# Altium PCB PCB_配电变压器智能监测系统_2022-01-25.pcbdoc (part 2 of 2)
Units mil, origin at the board's own origin, x right, y up, seen from the top; angles counter-clockwise.
Board outline 10255 x 6268.94 mil, 2 copper layers (Top Layer, Bottom Layer); 221 components, 191 nets, 862 pads, 208 vias.
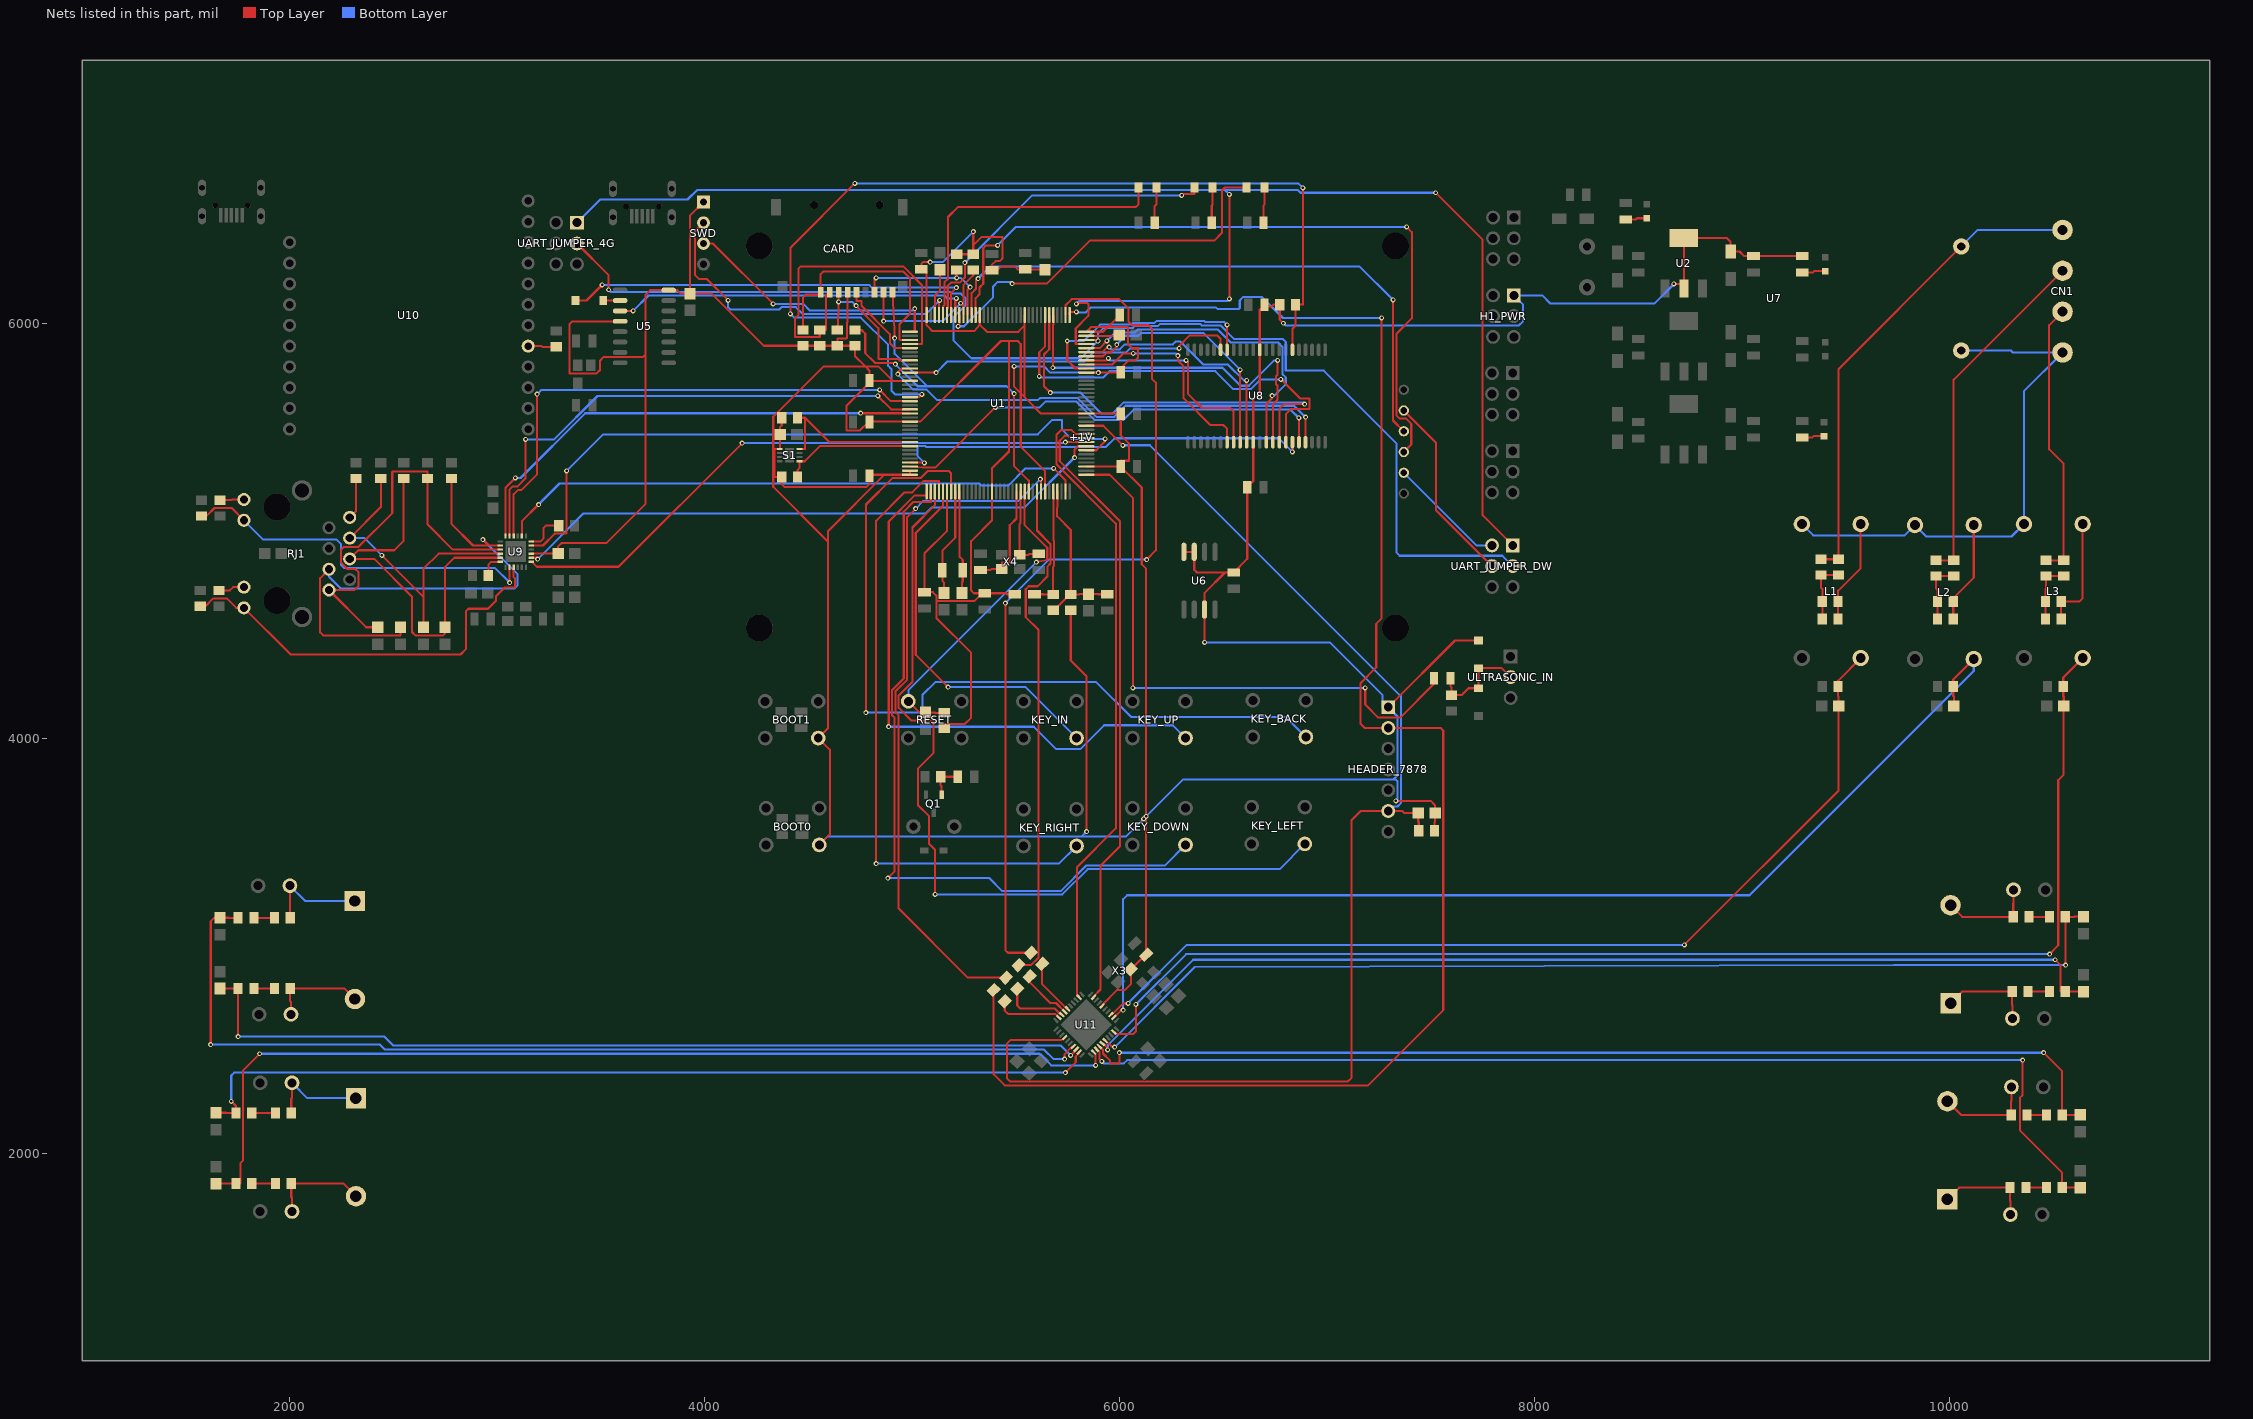
[diagram p2: the nets of this part, all layers, seen from the top]

## Via types
v1: diameter 24, hole 12, Top Layer to Bottom Layer, 208 vias

## Nets (pads, with @x,y where several pads share a name; then routed paths per layer and width w, separated by ;. In a path a pad name is that pad's centre, name@x,y a point inside that pad or via, vN(x,y) a via of type N, cw(c..) or ccw(c..) an arc to the next point about the centre after c; other vN are vias at no path point) (continued)
FSMC_D7: U1.63 U8.16 | length 1139.9
  Top Layer w10: v1(5748,5915) 5748,5821.82 5787.5,5782.32 U1.63@5840.2,5782.32 ; U8.16@6518.27,5872.66 v1(6518.27,5992.23)
  Bottom Layer w10: v1(5748,5915) 5828,5915 5907,5994 6056.5,5994 6065,6002.5 6169,6002.5 6178.5,6012 6408,6012 6414.41,6005.59 6504.91,6005.59 v1(6518.27,5992.23)
FSMC_D8: U1.64 U8.29 | length 1019.9
  Top Layer w10: U1.64@5840.2,5802.01 5965.53,5802.01 6019.02,5855.5 v1(6066.06,5855.5) ; v1(6281.5,5844.5) 6281.5,5819.91 6308.88,5792.54 6308.88,5638.62 6437.49,5510 6500,5510 6518.27,5491.73 U8.29@6518.27,5427.34
  Bottom Layer w10: v1(6066.06,5855.5) 6270.5,5855.5 v1(6281.5,5844.5)
FSMC_D9: U1.65 U8.30 | length 1056.8
  Top Layer w10: U1.65@5840.2,5821.69 5936.18,5821.69 v1(5945.68,5831.19) ; v1(6321,5821.5) 6330.64,5811.86 6330.64,5658.96 6397.6,5592 6532.76,5592 6549.76,5575 U8.30@6549.76,5427.34
  Bottom Layer w10: v1(5945.68,5831.19) 5955.37,5821.5 v1(6321,5821.5)
FSMC_D10: U1.66 U8.31 | length 1216.7
  Top Layer w10: U1.66@5840.2,5841.38 5920.34,5841.38 5939.87,5860.9 5960.31,5860.9 5986.5,5887.1 v1(5986.5,5898) ; U8.31@6581.26,5427.34 v1(6581.26,5775.74)
  Bottom Layer w10: v1(5986.5,5898) 6029,5940.5 6090.5,5940.5 6104.5,5954.5 6402.5,5954.5 v1(6581.26,5775.74)
FSMC_D11: U1.67 U8.32 | length 1177.8
  Top Layer w10: U1.67@5840.2,5861.06 5917.4,5861.06 5941.34,5885 v1(5950,5885) ; U8.32@6612.76,5427.34 6612.76,5724.76 v1(6613,5725)
  Bottom Layer w10: v1(5950,5885) 5960,5875 6001.07,5875 6025.07,5899 6256.5,5899 6270,5912.5 6292.5,5912.5 6403,5802 6522,5802 6599,5725 v1(6613,5725)
FSMC_D12: U1.68 U8.35 | length 1528.3
  Top Layer w10: U1.68@5840.2,5880.75 5904.25,5880.75 v1(5939.5,5916) ; U8.35@6707.24,5427.34 6707.24,5611.24 6735,5639 v1(6735,5651.5)
  Bottom Layer w10: v1(5939.5,5916) 5980,5956.5 6074.5,5956.5 6088.5,5970.5 6472.88,5970.5 6535.38,5908 6764.5,5908 6785,5887.5 6785,5756 6801,5740 6801,5706.74 6745.76,5651.5 v1(6735,5651.5)
FSMC_D13: U1.77 U8.36 | length 1835
  Top Layer w10: v1(5678.41,5786.09) 5678.41,5992.66 5680.75,5995 U1.77@5680.75,6040.2 ; U8.36@6738.74,5427.34 6738.74,5610.24 6761,5632.5 6761,5700.4 6754.66,5706.74 6754.66,5746.4 6762,5753.74 v1(6762,5822)
  Bottom Layer w10: v1(5678.41,5786.09) 5678.5,5786 6496,5786 6582.73,5699.27 6623.27,5699.27 6746,5822 v1(6762,5822)
FSMC_D14: U1.78 U8.37 | length 1982.6
  Top Layer w10: U1.78@5661.07,6040.2 5661.07,5875.08 5636,5850.02 5636,5697.59 v1(5667,5666.59) ; U8.37@6770.24,5427.34 6770.24,5588.74 6792.5,5611 v1(6892.5,5611)
  Bottom Layer w10: v1(5667,5666.59) 5811.41,5666.59 5912.5,5565.5 5967.5,5565.5 6021,5619 6884.5,5619 v1(6892.5,5611)
FSMC_D15: U1.79 U8.38 | length 2026
  Top Layer w10: v1(5613,5745) 5613,5860.62 5641.38,5889 U1.79@5641.38,6040.2 ; v1(6778,5730) 6870,5638 6913,5638 6915.5,5635.5 6915.5,5589 6914.5,5588 6827,5588 6801.73,5562.73 U8.38@6801.73,5427.34
  Bottom Layer w10: v1(5613,5745) 5619,5739 5921,5739 5952,5770 6461.56,5770 6548.56,5683 6633,5683 6680,5730 v1(6778,5730)
FSMC_NBL0: U1.141 U8.39 | length 2061.7
  Top Layer w10: U1.141@4989.81,5329.57 5057.87,5329.57 v1(5059.43,5328) ; v1(6833,5381) 6833.23,5381.23 U8.39@6833.23,5427.34
  Bottom Layer w10: v1(5059.43,5328) 5027,5360.43 5027,5407 5028,5408 5065,5408 5069,5404 5933.75,5404 5976,5446.25 6767.75,5446.25 v1(6833,5381)
FSMC_NBL1: U1.142 U8.40 | length 2199.5
  Top Layer w10: U1.142@4989.81,5309.88 5049.57,5304.76 5111.45,5304.76 v1(5401.69,5595) ; U8.40@6864.72,5427.34 v1(6864.72,5543.99)
  Bottom Layer w10: v1(5401.69,5595) 5614.78,5595 5643.81,5624.03 5789.97,5624.03 5880.5,5533.5 6016.84,5533.5 6067.93,5584.59 6824.12,5584.59 v1(6864.72,5543.99)
FSMC_NE3: R6.1 U1.125 U8.6 | length 4724.9
  Top Layer w10: v1(4414,6046) 4414,6365 v1(4724,6675) ; U1.125@4989.81,5644.53 5033.53,5644.53 v1(5047,5658) ; U8.6@6833.23,5872.66 6833.23,5973 6848.04,5987.81 R6.1@6848.04,6090 6883,6090 6884,6091 v1(6884,6653)
  Bottom Layer w10: v1(4414,6046) 4432,6028 4753,6028 4884.5,5896.5 4884.5,5795.5 4901,5779 4901,5675 4918,5658 v1(5047,5658) ; v1(4724,6675) 6862,6675 v1(6884,6653)
FSMC_NOE: U1.118 U8.41 | length 2297.7
  Top Layer w10: v1(4932,5755) 4932,5764.32 4950,5782.32 U1.118@4989.81,5782.32 ; U8.41@6896.22,5427.34 v1(6896.22,5547.78)
  Bottom Layer w10: v1(4932,5755) 5006,5681 5070,5681 5121,5630 5606.43,5630 5616.47,5640.03 5797.97,5640.03 5888.5,5549.5 5974.33,5549.5 6027.83,5603 6841,5603 v1(6896.22,5547.78)
FSMC_NWE: U1.119 U8.17 | length 1637.3
  Top Layer w10: U1.119@4989.81,5762.64 v1(5116,5762.64) ; v1(6287,5879.66) 6287,5891 6338,5942 6469.77,5942 6486.77,5925 U8.17@6486.77,5872.66
  Bottom Layer w10: v1(5116,5762.64) 5169.36,5816 5829,5816 5872,5859 6030.58,5859 6051.24,5879.66 v1(6287,5879.66)
IAN: C62.1 R60.2 U11.8 | length 4410.7
  Top Layer w10: C62.1@1665,2794.45 1708,2794.45 1708.55,2795 R60.2@1751.96,2795 v1(1751.96,2563) ; v1(5764.75,2471.75) 5791.28,2498.28 U11.8@5791.28,2501.69
  Bottom Layer w10: v1(1751.96,2563) 2456,2563 2499,2520 5716.5,2520 v1(5764.75,2471.75)
IAP: C61.2 R59.2 U11.7 | length 4959.3
  Top Layer w10: v1(1620,2524) 1620,3118.05 1637.5,3135.55 C61.2@1665,3135.55 1708,3135.55 1708.55,3135 R59.2@1751.96,3135 ; v1(5735,2454) 5735,2477.73 5772.87,2515.6 U11.7@5777.37,2515.6
  Bottom Layer w10: v1(1620,2524) 2436,2524 2460,2500 5636,2500 5682,2454 v1(5735,2454)
IBN: C63.1 R63.2 U11.12 | length 4902.5
  Top Layer w10: C63.1@1645,1854.45 1693,1854.45 1693.55,1855 R63.2@1741.96,1855 1764,1855 1764,1954 1776,1966 1776,2400 v1(1856,2480) ; U11.12@5874.8,2487.76 5885,2477.56 v1(5885,2424)
  Bottom Layer w10: v1(1856,2480) 5615,2480 5671,2424 v1(5885,2424)
IBP: C64.2 R64.2 U11.9 | length 4438.5
  Top Layer w10: C64.2@1645,2195.55 1693,2195.55 1693.55,2195 R64.2@1741.96,2195 1741.96,2228.04 v1(1719,2251) ; v1(5738.77,2389) 5789,2439.23 5789,2467.08 5805.21,2483.28 U11.9@5805.21,2487.76
  Bottom Layer w10: v1(1719,2251) 1719,2375 1733,2389 v1(5738.77,2389)
ICN: C65.1 R67.2 U11.14 | length 5077.7
  Top Layer w10: U11.14@5902.64,2515.6 5920.01,2498.23 5920.01,2481.33 5953,2448.34 5953,2434.76 5954,2433.76 5998.1,2433.76 5999.34,2435 v1(5999.34,2485) ; v1(10454,2485) 10543.04,2395.96 R67.2@10543.04,2185 10586,2185 10586.55,2185.55 C65.1@10630,2185.55
  Bottom Layer w10: v1(5999.34,2485) v1(10454,2485)
ICP: C66.2 R68.2 U11.13 | length 5308.1
  Top Layer w10: U11.13@5888.72,2501.69 5904.01,2486.4 5904.01,2453.58 v1(5914.59,2443) ; v1(10352,2449) 10352,2281 10339,2268 10339,2111 10543,1907 R68.2@10543.04,1835 ; R68.2@10543.04,1835 10586,1835 10586.55,1834.45 C66.2@10630,1834.45
  Bottom Layer w10: v1(5914.59,2443) 5923.83,2433.76 6021,2433.76 6036.24,2449 v1(10352,2449)
INN: C67.1 R71.2 U11.16 | length 5122.2
  Top Layer w10: U11.16@5930.47,2543.44 5934.41,2543.44 5966.01,2511.85 v1(5976,2511.85) ; v1(10559,2907) 10558.04,2907.96 R71.2@10558.04,3140 10601,3140 10601.55,3140.55 C67.1@10645,3140.55
  Bottom Layer w10: v1(5976,2511.85) 6362.15,2898 9732,2907 v1(10559,2907)
INP: C68.2 R72.2 U11.15 | length 5076.6
  Top Layer w10: U11.15@5916.56,2529.53 5920.48,2529.53 5943.01,2507 v1(5943.01,2498.74) ; v1(10509,2933) 10534,2908 10535,2780 R72.2@10558.04,2780 10601,2780 10601.55,2779.45 C68.2@10645,2779.45
  Bottom Layer w10: v1(5943.01,2498.74) 5943.01,2521.09 6354.92,2933 v1(10509,2933)
IRQ0_7878: U1.46 U11.29 | length 2994.6
  Top Layer w10: U1.46@5840.2,5447.68 5781.32,5447.68 5735.82,5458.5 5712,5434.68 5712,5336.17 6002,5046.17 6002,3480 5908,3386 5908,2789.92 5874.8,2756.72 U11.29@5874.8,2752.24
IRQ1_7878: U1.47 U11.32 | length 3077.4
  Top Layer w10: U11.32@5805.2,2752.24 5805.2,2756 5798,2756 5795,2759 5795,3379 5982,3566 5982,5035 5696,5321 5696,5463 5720,5487 5766.86,5487 5786.5,5467.36 U1.47@5840.2,5467.36
KEY_BACK: KEY_BACK.3 U1.7 | length 3905.2
  Top Layer w10: v1(4778,4124) 4778,5127 4905,5254 5041,5254 5075.76,5288.76 5176.24,5288.76 5188.62,5276.38 U1.7@5188.62,5189.8
  Bottom Layer w10: v1(4778,4124) 5037.5,4124 5050.5,4137 5050.5,4209.5 5112,4271 5887.5,4271 6055.5,4103 6801.37,4103 KEY_BACK.3@6897.95,4006.42
KEY_DOWN: KEY_DOWN.3 U1.2 | length 3561.4
  Top Layer w10: v1(4883,3326) 4916,3359 4916,4099 4903.61,4111.39 4903.61,4232.26 4960,4288.65 4960,5093 5006,5139 5089.2,5139 5090.2,5140 U1.2@5090.2,5189.8
  Bottom Layer w10: v1(4883,3326) 5373,3326 5435,3264 5717,3264 5841,3388 6219.54,3388 KEY_DOWN.3@6317.95,3486.42
KEY_IN: KEY_IN.3 U1.5 | length 1782.5
  Top Layer w10: U1.5@5149.25,5189.8 5149.25,5121 5018,4989.75 5018,4403 v1(5174,4247)
  Bottom Layer w10: v1(5174,4247) 5547.37,4247 KEY_IN.3@5792.95,4001.42
KEY_LEFT: KEY_LEFT.3 U1.3 | length 4093.1
  Top Layer w10: U1.3@5109.88,5189.8 5109.88,5124 5002,5016.12 5002,4273 4935.61,4206.61 4935.61,4147.39 4997,4086 5102,4086 5103,4085 5103,3929 5028,3854 5028,3679 5082,3625 5082,3491 5111,3462 v1(5111,3248)
  Bottom Layer w10: v1(5111,3248) 5724,3248 5846,3370 6771.54,3370 KEY_LEFT.3@6892.95,3491.42
KEY_RIGHT: KEY_RIGHT.3 U1.4 | length 3087.1
  Top Layer w10: v1(4827,3396) 4827,5049.05 4963.77,5185.82 5001,5185.82 5056.18,5241 5128.57,5241 5129.57,5240 U1.4@5129.57,5189.8
  Bottom Layer w10: v1(4827,3396) 5707.54,3396 KEY_RIGHT.3@5792.95,3481.42
KEY_UP: KEY_UP.3 U1.1 | length 2790.9
  Top Layer w10: v1(4887.61,4056) 4887.61,5045.03 5013.9,5171.32 5070.51,5171.32 U1.1@5070.51,5189.8
  Bottom Layer w10: v1(4887.61,4056) 5587,4056 5695,3948 5811,3948 5926,4063 6256.37,4063 KEY_UP.3@6317.95,4001.42
L1_3: L1.3 R45.2 R46.2 | length 502.8
  Top Layer w10: R46.2@9463.04,4575 R45.2@9463.04,4660 9463.04,4712 9571.7,4820.66 L1.3@9571.7,5032.8
L4_1: L4.1 R61.1 U13.1 | length 459.7
  Top Layer w10: U13.1@2006.77,2670 2006.77,2730 2003.04,2733.73 R61.1@2003.04,2795 2263.78,2795 L4.1@2315,2743.78
L4_2: L4.2 R58.1 U12.2 | length 499.3
  Top Layer w10: U12.2@2001.77,3290 2001.77,3212.27 2003.04,3211 R58.1@2003.04,3135
  Bottom Layer w10: U12.2@2001.77,3290 2075.55,3216.22 L4.2@2315,3216.22
LED1: LED1.2 U1.104 | length 1506.7
  Top Layer w10: U1.104@5149.25,6040.2 5149.25,6081.25 5156,6088 5156,6198 5173,6215 5173,6512.5 5220.89,6560.39 6077.09,6560.39 6091.7,6575 LED1.2@6091.7,6655
LED2: LED2.2 U1.103 | length 1588.8
  Top Layer w10: U1.103@5168.94,6040.2 5168.94,6072.04 5172,6072.04 5172,6180.5 5187.5,6196 5229.03,6196 5255,6221.97 v1(5255,6293) ; v1(6299,6617) 6306,6624 6360.7,6624 6361.7,6625 LED2.2@6361.7,6655
  Bottom Layer w10: v1(5255,6293) 5579,6617 v1(6299,6617)
LED3: LED3.2 U1.100 | length 1879.1
  Top Layer w10: v1(5222,5986) 5222,5990 5227.99,5995.99 U1.100@5227.99,6040.2 ; v1(5481.75,6191.75) 5649.75,6191.75 5857,6399 6457,6399 6494,6436 6494,6640.5 6508.5,6655 LED3.2@6611.7,6655
  Bottom Layer w10: v1(5222,5986) 5250.63,5986 5390.59,6125.96 5390.59,6177.59 5411.5,6198.5 5475,6198.5 v1(5481.75,6191.75)
LINK_LED: R13.2 RJ1.9 U9.3 | length 1997.6
  Top Layer w10: R13.2@1570,4636.96 1595,4636.96 1633.04,4675 1697,4675 1743,4629 RJ1.9@1780.13,4629 2005.13,4404 2824,4404 2850,4430 2850,4612 2862.5,4624.5 2956.5,4624.5 2995,4663 2995,4685 3037.15,4727.15 3085,4727.15 3086.79,4728.94 3086.79,4770.16 3080.16,4776.79 U9.3@3080.16,4824.9
MISO_7878: R29.2 U1.28 | length 2485.3
  Top Layer w10: R29.2@5513.1,2906.9 5572.9,2906.9 5610,2944 5610,4522 5548,4584 5548,4718.5 5562.5,4733 5605,4733 5652,4780 5652,4827.17 5667.51,4842.68 5667.51,4936.06 5602.01,5001.56 U1.28@5602.01,5189.8
MOSI_7878: R28.2 U1.29 | length 3350.3
  Top Layer w10: v1(5017.38,5107.38) 4976,5066 4976,4282.02 4919.61,4225.63 4919.61,4126.78 4935,4111.39 4935,3180 5268.1,2846.9 R28.2@5453.1,2846.9 ; v1(5618,5249) 5621.7,5245.3 U1.29@5621.7,5189.8
  Bottom Layer w10: v1(5017.38,5107.38) 5054.88,5144.88 5513.88,5144.88 v1(5618,5249)
N_IN: CN1.4 L1.4 L2.4 L3.4 U7.2 | length 2557.3
  Bottom Layer w10: L1.4@9288.3,5032.8 9343.1,4978 9783.5,4978 L2.4@9833.3,5027.8 9888.1,4973 10298.5,4973 L3.4@10358.3,5032.8 10358.3,5673.03 CN1.4@10545,5859.73 10305.29,5859.73 10296,5869.02 U7.2@10056.58,5869.02
OSC_IN_16M: C70.1 U1.23 X4.1 | length 526.9
  Top Layer w10: C70.1@5330,4810.63 5377.13,4810.63 5382.07,4815.56 X4.1@5431.69,4815.56 5432.69,4847 5471,4850 5471,5027 5503.59,5059.59 U1.23@5503.59,5189.8
OSC_IN_32768: C71.2 U1.8 X5.2 | length 519
  Top Layer w10: C71.2@5155,4700.55 5155,4750 5145.79,4759.21 X5.2@5145.79,4810 5145.79,4905 5208.31,4967.52 U1.8@5208.31,5189.8
OSC_OUT_16M: C69.1 U1.24 X4.3 | length 401.1
  Top Layer w10: U1.24@5523.27,5189.8 5523.27,5038.97 5518.3,5034 X4.3@5518.3,4884.46 5561,4884.46 5565.91,4889.37 C69.1@5610,4889.37
OSC_OUT_32768: C72.2 U1.9 X5.1 | length 497.7
  Top Layer w10: U1.9@5227.99,5189.8 5227.99,4876.22 5244.21,4860 X5.1@5244.21,4810 5244.21,4757.21 5240,4753 C72.2@5240,4700.55
Q1_1: Q1.1 R31.1 R32.1 | length 171
  Top Layer w10: Q1.1@5142.4,3728.36 5142.4,3769 5138.04,3773.36 R31.1@5138.04,3815 R32.1@5220.63,3815
R3_1: R3.1 VCC_LED.1 | length 112.4
  Top Layer w10: R3.1@9290,6245.63 9342,6245.63 9347.87,6251.5 VCC_LED.1@9400,6251.5
R5_1: 3V3_AUX_LED.1 R5.1 | length 107.4
  Top Layer w10: R5.1@9290,5450.63 9339,5450.63 9344.87,5456.5 3V3_AUX_LED.1@9395,5456.5
R15_2: R15.2 U9.12 | length 192.5
  Top Layer w10: U9.12@3165.1,4949.21 3209.71,4949.21 3223,4962.5 3223,5012.5 3235.5,5025 R15.2@3296.96,5025
R16_1: R16.1 U9.24 | length 114.9
  Top Layer w10: R16.1@2958.04,4785 2958.04,4837.5 2971.33,4850.79 U9.24@3014.9,4850.79
R21_2: R21.2 RJ1.8 | length 199.3
  Top Layer w10: RJ1.8@2289.87,5065.1 2320,5095.23 R21.2@2320,5251.96
R22_1: R22.1 RJ1.10 | length 126.7
  Top Layer w10: R22.1@1660,4713.04 1712,4713.04 1727.96,4729 RJ1.10@1780.13,4729
R23_1: R23.1 RJ1.12 | length 116.4
  Top Layer w10: R23.1@1665,5148.04 1721,5148.04 1723.96,5151 RJ1.12@1780.13,5151
R33_1: 5V_LED.1 R33.1 | length 102.4
  Top Layer w10: R33.1@8440,6500.63 8487,6500.63 8492.87,6506.5 5V_LED.1@8540,6506.5
R36_2: LED3.1 R36.2 | length 171.6
  Top Layer w10: R36.2@6694.37,6485 6694.37,6568 6698.31,6571.94 LED3.1@6698.31,6655
R37_2: LED2.1 R37.2 | length 171.6
  Top Layer w10: R37.2@6444.37,6485 6444.37,6568 6448.31,6571.94 LED2.1@6448.31,6655
R38_2: LED1.1 R38.2 | length 173.7
  Top Layer w10: R38.2@6169.37,6485 6169.37,6565 6178.31,6573.94 LED1.1@6178.31,6655
R43_2: R43.2 R44.2 R45.1 R46.1 | length 299.8
  Top Layer w10: R46.1@9386.96,4575 R45.1@9386.96,4660 9386.96,4720 9380,4726.96 R44.2@9380,4786.96 R43.2@9465,4786.96
R49_1: R49.1 R50.1 R51.2 R52.2 | length 294.8
  Top Layer w10: R50.1@9941.96,4575 R49.1@9941.96,4660 9941.96,4717 9935,4723.96 R51.2@9935,4781.96 R52.2@10020,4781.96
R49_2: L2.3 R49.2 R50.2 | length 493.7
  Top Layer w10: R50.2@10018.04,4575 R49.2@10018.04,4660 10018.04,4676 10116.7,4774.66 L2.3@10116.7,5027.8
R54_1: R54.1 R55.1 R56.2 R57.2 | length 293.2
  Top Layer w10: R55.1@10461.96,4575 R54.1@10461.96,4660 10461.96,4719 10465,4722.04 R56.2@10465,4781.96 R57.2@10550,4781.96
R54_2: L3.3 R54.2 R55.2 | length 552.7
  Top Layer w10: R55.2@10538.04,4575 R54.2@10538.04,4660 10626.7,4660 10641.7,4675 L3.3@10641.7,5032.8
R58_2: R58.2 R59.1 | length 98.9
  Top Layer w10: R59.1@1828.04,3135 R58.2@1926.96,3135
R60_1: R60.1 R61.2 | length 98.9
  Top Layer w10: R60.1@1828.04,2795 R61.2@1926.96,2795
R62_1: L5.1 R62.1 U14.1 | length 473.9
  Top Layer w10: U14.1@2011.77,1720 2011.77,1785 2008.04,1788.73 R62.1@2008.04,1855 2258.78,1855 L5.1@2320,1793.78
R62_2: R62.2 R63.1 | length 113.9
  Top Layer w10: R63.1@1818.04,1855 R62.2@1931.96,1855
R64_1: R64.1 R65.2 | length 113.9
  Top Layer w10: R64.1@1818.04,2195 R65.2@1931.96,2195
R65_1: L5.2 R65.1 U15.2 | length 485.3
  Top Layer w10: R65.1@2008.04,2195 2008.04,2265 2011.77,2268.73 U15.2@2011.77,2340
  Bottom Layer w10: U15.2@2011.77,2340 2085.55,2266.22 L5.2@2320,2266.22
R66_1: L6.1 R66.1 U16.1 | length 469.9
  Top Layer w10: L6.1@9990,2251.22 10056.22,2185 R66.1@10296.96,2185 10296.96,2251 10298.23,2252.27 U16.1@10298.23,2320
R66_2: R66.2 R67.1 | length 93.9
  Top Layer w10: R66.2@10373.04,2185 R67.1@10466.96,2185
R68_1: R68.1 R69.2 | length 98.9
  Top Layer w10: R69.2@10368.04,1835 R68.1@10466.96,1835
R69_1: L6.2 R69.1 U17.2 | length 455.8
  Top Layer w10: L6.2@9990,1778.78 10046.22,1835 R69.1@10291.96,1835 10291.96,1770.27 10293.23,1769 U17.2@10293.23,1705
R70_1: L7.1 R70.1 U18.1 | length 455.8
  Top Layer w10: L7.1@10005,3196.22 10061.22,3140 R70.1@10306.96,3140 10306.96,3204 10308.23,3205.27 U18.1@10308.23,3270
R70_2: R70.2 R71.1 | length 98.9
  Top Layer w10: R70.2@10383.04,3140 R71.1@10481.96,3140
R72_1: R72.1 R73.2 | length 103.9
  Top Layer w10: R73.2@10378.04,2780 R72.1@10481.96,2780
R73_1: L7.2 R73.1 U19.2 | length 450.8
  Top Layer w10: L7.2@10005,2723.78 10061.22,2780 R73.1@10301.96,2780 10301.96,2715.27 10303.23,2714 U19.2@10303.23,2650
RESET_7878: C78.1 HEADER_7878.6 R74.1 U1.49 U11.4 | length 6449.8
  Top Layer w10: U11.4@5735.6,2557.36 5720.76,2547 5475,2547 5457,2529 5457,2362.5 5473.5,2346 7100.5,2346 7117,2362.5 7117,3604 7163,3650 HEADER_7878.6@7295,3650 7362,3650 7372,3640 C78.1@7439.45,3640 7439.45,3598.51 7441.96,3596 R74.1@7441.96,3555 ; U1.49@5840.2,5506.73 5921.96,5506.73 v1(6016.19,5412.5)
  Bottom Layer w10: v1(6016.19,5412.5) 6146.5,5412.5 7355.47,4203.53 7355.47,3687.5 7339.34,3671.37 7316.37,3671.37 HEADER_7878.6@7295,3650
RMII_CRS_DV: U1.43 U9.11 | length 3375.6
  Top Layer w10: U9.11@3165.1,4929.53 3221.53,4929.53 3278,4986 3335,4987 v1(3335,5289) ; U1.43@5840.2,5388.62 5887.62,5388.62 5930,5431 v1(5930,5443.5)
  Bottom Layer w10: v1(3335,5289) 3511,5465 5606,5465 5676,5535 5722,5534 5722,5489.46 5767.96,5443.5 v1(5930,5443.5)
RMII_REF_CLK: U1.35 U9.14 | length 2883.3
  Top Layer w10: U9.14@3119.53,4975.1 3119.53,5046.74 v1(3199.79,5127) ; v1(5682.43,5301) 5739.81,5243.63 U1.35@5739.81,5189.8
  Bottom Layer w10: v1(3199.79,5127) 3300.79,5228 5324.19,5228 5334.47,5217.72 5463.72,5217.72 5547,5301 v1(5682.43,5301)
RMII_RXD0: U1.44 U9.8 | length 2925.4
  Top Layer w10: U9.8@3165.1,4870.47 3189.53,4870.47 v1(3196,4864) ; v1(5783,5353.5) 5783,5391.31 5800,5408.31 U1.44@5840.2,5408.31
  Bottom Layer w10: v1(3196,4864) 3416.38,5084.38 5065.38,5084.38 5093,5112 5541.5,5112 v1(5783,5353.5)
RMII_RXD1: U1.45 U9.7 | length 2933.9
  Top Layer w10: U9.7@3165.1,4850.79 3168,4850.79 3191.79,4827 3585,4827 v1(4181,5423) ; v1(5739.07,5427.99) U1.45@5840.2,5427.99
  Bottom Layer w10: v1(4181,5423) 4182,5424 5735.07,5424 v1(5739.07,5427.99)
RMII_TX_EN: U1.126 U9.16 | length 2568.3
  Top Layer w10: U9.16@3080.16,4975.1 3080.16,5176.39 3100,5196.23 3117.23,5196.23 3193,5272 v1(3193,5659) ; v1(4843.5,5679) 4897.66,5624.84 U1.126@4989.81,5624.84
  Bottom Layer w10: v1(3193,5659) 3213,5679 v1(4843.5,5679)
RMII_TXD0: U1.128 U9.17 | length 2476.3
  Top Layer w10: U9.17@3060.47,4975.1 3060.47,5200 3073.97,5213.5 3096.5,5213.5 3138,5255 v1(3138,5441) ; v1(4835,5650) 4899.53,5585.47 U1.128@4989.81,5585.47
  Bottom Layer w10: v1(3138,5441) 3275,5441 3484,5650 v1(4835,5650)
RMII_TXD1: U1.129 U9.18 | length 2330.5
  Top Layer w10: U9.18@3040.79,4975.1 3040.79,5207.79 v1(3088,5255) ; v1(4752,5567) 4954.79,5567 U1.129@4989.81,5565.79
  Bottom Layer w10: v1(3088,5255) 3113,5255 3425,5567 v1(4752,5567)
RST: C49.1 R26.2 RESET.2 U1.25 | length 1550.3
  Top Layer w10: RESET.2@4982.05,4178.58 5035.08,4125.55 C49.1@5065,4125.55 5108,4125.55 5110.51,4123.04 R26.2@5155,4123.04 ; U1.25@5542.96,5189.8 5542.96,5027.56 5651.51,4919 5651.51,4860 v1(5599,4849)
  Bottom Layer w10: RESET.2@4982.05,4178.58 4982.05,4232.05 v1(5599,4849)
SCLK_7878: R30.2 U1.74 | length 4278.5
  Top Layer w10: v1(5450,4652) 5450,2979.4 5462.5,2966.9 R30.2@5573.1,2966.9 ; U1.74@5739.81,6040.2 5739.81,6087.31 5769,6116.5 5998.01,6116.5 6042.42,6072.09 6042.42,6009.18 6060.6,5991 6140,5991 6155.5,5975.5 6155.5,5733.69 6175,5714.19 6175,4906.5 v1(6130,4861.5)
  Bottom Layer w10: v1(5450,4652) 5659.5,4861.5 v1(6130,4861.5)
SDIO_CMD: CARD.3 R7.1 U1.116 | length 729.6
  Top Layer w10: R7.1@4640,5968.04 4646.24,6062.24 v1(4646.24,6104) CARD.3@4646.24,6150.27 ; v1(4730,6085) 4838,5977 4838,5829 4839,5828 4932.69,5828 4939,5821.69 U1.116@4989.81,5821.69
  Bottom Layer w10: v1(4646.24,6104) 4711,6104 v1(4730,6085)
SDIO_D0: CARD.7 R11.1 U1.98 | length 720.7
  Top Layer w10: CARD.7@4819.19,6150.27 4819.19,6211.19 v1(4827,6219) ; v1(5215,6219) R11.1@5215,6256.96 ; U1.98@5267.36,6040.2 5267.36,6162 v1(5279.86,6174.5)
  Bottom Layer w10: v1(4827,6219) v1(5215,6219) 5235.36,6219 v1(5279.86,6174.5)
SDIO_D1: CARD.8 R10.1 U1.99 | length 801.8
  Top Layer w10: CARD.8@4862.42,6150.27 4862.42,6011.58 v1(4863,6011) ; v1(5234,6097) 5247.68,6083.32 ; U1.99@5247.68,6040.2 5247.68,6083.32 ; R10.1@5295,6256.96 5295,6231 5247.68,6183.68 5247.68,6083.32
  Bottom Layer w10: v1(4863,6011) 5148,6011 v1(5234,6097)
SDIO_D2: CARD.1 R9.1 U1.111 | length 1162.2
  Top Layer w10: R9.1@4475,5968.04 4475,6125.5 4487.5,6138 4559.78,6138 CARD.1@4559.78,6150.27 4559.78,6237.5 4572.28,6250 4957,6250 4990,6217 4990,6047 4939.44,5996.44 4939.44,5923.56 4942.88,5920.12 U1.111@4989.81,5920.12
SDIO_D3: CARD.2 R8.1 U1.112 | length 1694.8
  Top Layer w10: CARD.2@4603.07,6150.34 4603.07,6139 4586,6139 4585,6138 4585,5969.04 4584,5968.04 R8.1@4555,5968.04 4555,5935 4554,5934 4437,5934 4436,5935 4436,6024 4452,6040 4452,6262.5 4464.5,6275 4957,6275 5047,6185 5047,5901.43 5046,5900.43 U1.112@4989.81,5900.43
SDIO_SCK: CARD.5 U1.113 | length 430.7
  Top Layer w10: CARD.5@4732.78,6150.27 4732.78,6109 4733.89,6107.89 4755,6107.89 4756.35,6106.54 4756.35,6084.32 4893,5947.67 4893,5905.3 4917.55,5880.75 U1.113@4989.81,5880.75
SHT31_SCL: R35.2 S1.4 U1.136 | length 766.9
  Top Layer w10: R35.2@4448.04,5545 4484,5545 4485,5544 ; S1.4@4457.25,5394.53 4484,5394.53 4485,5395.53 4485,5544 ; U1.136@4989.81,5427.99 4601.01,5427.99 4485,5544
SHT31_SDA: R34.1 S1.1 U1.137 | length 642
  Top Layer w10: R34.1@4448.04,5260 4448.04,5293 4457.24,5302.2 S1.1@4457.24,5335.47 4483,5335.47 4555.84,5408.31 U1.137@4989.81,5408.31
SPEED_LED: R14.2 RJ1.11 U9.2 | length 1782.4
  Top Layer w10: R14.2@1575,5071.96 1600,5071.96 1638.04,5110 1721.13,5110 RJ1.11@1780.13,5051 ; v1(3060.47,4751) U9.2@3060.47,4824.9
  Bottom Layer w10: RJ1.11@1780.13,5051 1873.13,4958 2226.5,4958 2247,4937.5 2247,4837.5 2262.5,4822 2989.47,4822 v1(3060.47,4751)
SS_7878: HEADER_7878.2 R27.2 U1.73 | length 8122
  Top Layer w10: R27.2@5393.1,2786.9 5393.1,2380.9 5446,2328 7198,2328 7560,2690 7560,4037.5 7547.5,4050 HEADER_7878.2@7295,4050 7181,4050 7161,4070 7161,4266 7237,4342 7237,4552 7263,4578 v1(7263,6026) ; U1.73@5759.49,6040.2 5759.49,6055 v1(5792,6055)
  Bottom Layer w10: v1(5792,6055) 5794,6053 5837,6053 5860,6076 6465.59,6076 6472,6069.59 6574.85,6069.59 6579.26,6074 6579.26,6110.26 6597,6128 6686,6128 6788,6026 v1(7263,6026)
SWD_CLK: SWD.3 U1.109 | length 1290.3
  Top Layer w10: SWD.3@3995,6385 4039.5,6385 v1(4330.5,6094) ; U1.109@4989.81,5959.49 5013,5959.49 v1(5013,6071)
  Bottom Layer w10: v1(4330.5,6094) 4475,6094 4507.11,6061.89 5003.89,6061.89 v1(5013,6071)
SWD_DIO: SWD.2 U1.105 | length 1654.8
  Top Layer w10: SWD.2@3995,6485 3953,6443 3953,6235 3975,6213 4012,6213 v1(4114,6111) ; U1.105@5129.57,6040.2 5129.57,6107.57 v1(5133,6111)
  Bottom Layer w10: v1(4114,6111) 4114,6077 4125,6066 4359,6066 4371,6078 4440,6078 4472.11,6045.89 5067.89,6045.89 v1(5133,6111)
TF_IN: CARD.9 R12.1 U1.26 | length 1967.6
  Top Layer w10: R12.1@4725,5968.04 4756.59,5968.04 4774.63,5950 4774.63,5856.87 4822.5,5809 4914,5809 v1(4919.5,5803.5) ; CARD.9@4905.88,6150.27 4916,5966.88 v1(4916,5929) ; v1(5492,5661) 5492,5312 5562.64,5241.36 U1.26@5562.64,5189.8
  Bottom Layer w10: v1(4916,5929) 4916,5853.5 5072.5,5697 ; v1(4919.5,5803.5) 5026,5697 5072.5,5697 ; v1(5492,5661) 5456,5697 5072.5,5697
TPRX+: C43.2 R17.1 RJ1.4 U9.23 | length 1916.4
  Top Layer w10: R17.1@2550,5251.96 2550,4952.5 2504.1,4906.6 2331.37,4906.6 RJ1.4@2289.87,4865.1 2407.96,4865.1 2590,4683.06 2590,4512.5 2607.5,4495 2737.5,4495 2750,4507.5 C43.2@2750,4535.55 2750,4826.5 2793.97,4870.47 U9.23@3014.9,4870.47
TPRX-: C42.2 R18.1 RJ1.6 U9.22 | length 1503.1
  Top Layer w10: RJ1.6@2289.87,4965.1 2440,5115.23 R18.1@2440,5251.96 ; v1(2445,4882) 2645,4682 ; C42.2@2645,4535.55 2645,4682 ; U9.22@3014.9,4890.16 2718.16,4890.16 2645,4817 2645,4682
  Bottom Layer w10: RJ1.6@2289.87,4965.1 2361.9,4965.1 v1(2445,4882)
TPTX+: C45.2 R19.1 RJ1.1 U9.21 | length 2035.6
  Top Layer w10: C45.2@2425,4535.55 2369.42,4535.55 RJ1.1@2189.97,4715 2312.5,4715 2333,4735.5 2333,4800 2317,4816 2278.87,4816 2247,4847.87 2247,4907.1 2262.5,4922.6 2332,4922.6 2495,5085.6 2495,5284 2497,5286 2664,5286 2665,5285 R19.1@2665,5251.96 2665,5031.84 2787,4909.84 U9.21@3014.9,4909.84
TPTX-: C44.2 R20.1 RJ1.3 U9.20 | length 2556.1
  Top Layer w10: RJ1.3@2189.97,4815 2147,4772.03 2147,4511.5 2162.5,4496 2534,4496 2535,4497 C44.2@2535,4535.55 ; R20.1@2780,5251.96 2780,5033.53 2884,4929.53 2960.47,4929.53 ; v1(2932,4958) 2960.47,4929.53 ; U9.20@3014.9,4929.53 2960.47,4929.53
  Bottom Layer w10: RJ1.3@2189.97,4815 2189.97,4779.03 2247,4722 3083.5,4722 3099,4737.5 3099,4791 v1(2932,4958)
U1_71: C73.1 U1.71 | length 161.4
  Top Layer w10: U1.71@5840.2,5939.8 5994.25,5939.8 C73.1@5999.45,5945
U1_106: C74.2 U1.106 | length 229.7
  Top Layer w10: U1.106@5109.88,6040.2 5109.88,6134.04 5135,6159.16 C74.2@5135,6259.45
U5_2: D5.1 U5.2 | length 81.4
  Top Layer w10: D5.1@3511.63,6110 U5.2@3593,6110
U10_18: R40.2 U10.18 | length 136.5
  Top Layer w10: U10.18@3149.92,5890.32 3215,5890.32 3218.36,5886.96 R40.2@3285,5886.96
U11_36: R30.1 U11.36 | length 269.6
  Top Layer w10: R30.1@5626.9,2913.1 5626.9,2815.25 5745.59,2696.56 U11.36@5749.53,2696.56
U11_37: R29.1 U11.37 | length 256.3
  Top Layer w10: R29.1@5566.9,2853.1 5566.9,2824.17 5666.68,2724.39 5693.85,2724.39 U11.37@5735.6,2682.64
U11_38: R28.1 U11.38 | length 313.5
  Top Layer w10: R28.1@5506.9,2793.1 5506.9,2712.5 5521.4,2698 5688.47,2698 5717.75,2668.72 U11.38@5721.69,2668.72
U11_39: R27.1 U11.39 | length 320
  Top Layer w10: R27.1@5446.9,2733.1 5446.9,2687.5 5462.4,2672 5690.56,2672 U11.39@5707.76,2654.8
ULTRASONIC_ADC: R42.1 U1.37 | length 2838.2
  Top Layer w10: U1.37@5840.2,5270.51 5952.49,5270.51 6064,5159 v1(6064,4243) ; v1(7184,4243) 7184,4163 7247,4100 7352.63,4100 7515.63,4263 R42.1@7515.63,4290
  Bottom Layer w10: v1(6064,4243) v1(7184,4243)
ULTRASONIC_IN: D2.2 D4.1 R41.2 R42.2 ULTRASONIC_IN.2 | length 497.9
  Top Layer w10: R42.2@7594.37,4290 7594.37,4251.63 7600,4246 R41.2@7600,4208.04 7648,4208.04 7681.59,4241.63 D4.1@7730,4241.63 D2.2@7730,4338.37 7841.63,4338.37 ULTRASONIC_IN.2@7885,4295
USART1_RX: D5.2 U1.102 | length 2014.2
  Top Layer w10: D5.2@3378.37,6110 3431,6110 v1(3506,6185) ; U1.102@5188.62,6040.2 5188.62,6147.5 v1(5213.62,6172.5)
  Bottom Layer w10: v1(3506,6185) 4793.15,6185 4805.65,6172.5 v1(5213.62,6172.5)
USART1_TX: U1.101 U5.3 | length 1739.6
  Top Layer w10: U5.3@3593,6060 v1(3656,6060) ; U1.101@5208.31,6040.2 5208.31,6114.31 v1(5214,6120)
  Bottom Layer w10: v1(3656,6060) 3730.04,6134.04 5155.88,6134.04 5169.92,6120 v1(5214,6120)
USART3_RX: U1.70 UART_JUMPER_4G.3 UART_JUMPER_DW.3 | length 6007.1
  Top Layer w10: UART_JUMPER_4G.3@3385,6385 3538,6232 v1(3538,6162) ; U1.70@5840.2,5920.12 v1@5888.88,5920.12 ; v1(5895,5914) v1@5888.88,5920.12 ; v1(5897,5916) 5892.88,5920.12 v1@5888.88,5920.12
  Bottom Layer w10: v1(3538,6162) 3549,6151 5184,6151 5192,6143 5236,6143 5257.94,6121.06 5257.94,6088.09 5199,6029.15 5199,5918.5 5285.5,5832 5813,5832 v1(5895,5914) ; v1(5897,5916) 5897,5952 5923,5978 6064,5978 6072.5,5986.5 6185,5986.5 6194.5,5996 6390.51,5996 6396.92,5989.59 6487.41,5989.59 6553,5924 6787.5,5924 6801,5910.5 6801,5773 6802,5772 6984,5772 7334,5422 7334,4896 7350,4880 7845,4880 UART_JUMPER_DW.3@7895,4830
USART3_RX_DW: +1V.5 UART_JUMPER_DW.4 | length 926
  Top Layer w10: +1V.5@7370,5580 7525,5425 7525,5100 UART_JUMPER_DW.4@7795,4830
USART3_TX: U1.69 UART_JUMPER_4G.1 UART_JUMPER_DW.1 | length 7675.5
  Top Layer w10: v1(5792,6093.5) 5797.5,6099 5844.5,6099 5850,6093.5 5850,6036.5 5789,5975.5 5789,5901.43 5790,5900.43 U1.69@5840.2,5900.43 ; v1(6529.5,6118.5) v1(6529.5,6622) ; v1(7523.47,6629.53) 7750,6403 7750,5075 UART_JUMPER_DW.1@7895,4930
  Bottom Layer w10: UART_JUMPER_4G.1@3385,6485 3497,6597 3918,6597 3964,6643 6508.5,6643 ; v1(5792,6093.5) 5806.5,6108 6519,6108 v1(6529.5,6118.5) ; v1(6529.5,6622) 6508.5,6643 ; v1(7523.47,6629.53) 6871.85,6629.53 6858.38,6643 6508.5,6643
USART3_TX_DW: +1V.2 UART_JUMPER_DW.2 | length 570
  Bottom Layer w10: +1V.2@7370,5280 7720,4930 UART_JUMPER_DW.2@7795,4930
USART6_RX: +1V.4 U1.97 | length 2934.7
  Top Layer w10: U1.97@5287.05,6040.2 5287.05,6145.05 5308.36,6166.36 5308.36,6206.36 v1(5318,6216) ; v1(7318,6113) 7318,5532 +1V.4@7370,5480
  Bottom Layer w10: v1(5318,6216) 5377,6275 7156,6275 v1(7318,6113)
USART6_TX: +1V.3 U1.96 | length 3610.1
  Top Layer w10: U1.96@5306.73,6040.2 5306.73,6121.73 5325,6140 5325,6173 5343,6191 5343,6362.5 5356.5,6376 v1(5412,6376) ; +1V.3@7370,5380 7406,5416 7406,5516 7381,5541 7350,5541 7334,5557 7334,5949 7409,6024 7409,6440 v1(7384,6465)
  Bottom Layer w10: v1(5412,6376) 5501,6465 v1(7384,6465)
VAP: C58.2 L1.1 R47.2 U11.23 | length 4639.2
  Top Layer w10: U11.23@5958.31,2668.72 5962.81,2668.72 6017.09,2723 v1(6041,2723) ; v1(8722,3005) 9465.55,3748.55 C58.2@9465.55,4155 9465.55,4201 9463.04,4203.51 R47.2@9463.04,4250 9463.04,4278.54 L1.1@9571.7,4387.2
  Bottom Layer w10: v1(6041,2723) 6323,3005 v1(8722,3005)
VAP_IN: CN1.1 R43.1 R44.1 U7.1 | length 2359.3
  Top Layer w10: R44.1@9380,4863.04 R43.1@9465,4863.04 9465,5779.41 U7.1@10056.58,6370.99
  Bottom Layer w10: U7.1@10056.58,6370.99 10135.87,6450.28 CN1.1@10545,6450.28
VBP: C59.2 L2.1 R48.2 U11.22 | length 5476.1
  Top Layer w10: U11.22@5972.24,2654.8 6007.56,2690.12 v1(6017.44,2690.12) ; C59.2@10020.55,4155 10020.55,4201 10018.04,4203.51 R48.2@10018.04,4250 10018.04,4283.54 L2.1@10116.7,4382.2
  Bottom Layer w10: v1(6017.44,2690.12) 6017.44,3225 6036.44,3244 9036,3244 10116.7,4324.7 L2.1@10116.7,4382.2
VBP_IN: CN1.2 R51.1 R52.1 | length 1697.9
  Top Layer w10: R51.1@9935,4858.04 R52.1@10020,4858.04 10020,5728.43 CN1.2@10545,6253.43
VCC: BOOT0.3 BOOT1.3 C4.2 C5.2 C6.2 C7.2 C8.2 C9.2 C10.2 C11.2 C12.2 C13.2 C14.2 C15.2 C16.2 C19.1 C20.2 C29.2 C32.2 C33.1 C34.2 C38.2 C50.2 C57.2 C75.2 C78.2 CARD.4 D2.1 H1_PWR.1 HEADER_7878.1 R1.1 R3.2 R6.2 R7.2 R8.2 R9.2 R10.2 R11.2 R12.2 R26.1 R34.2 R35.1 R74.2 S1.5 SWD.1 U1.6 U1.17 U1.30 U1.39 U1.52 U1.62 U1.72 U1.84 U1.95 U1.108 U1.121 U1.131 U1.143 U1.144 U2.2 U2.4 U5.4 U5.16 U6.3 U6.7 U6.8 U8.11 U8.33 U9.9 U11.26 X3.4 | length 34946.4
  Top Layer w10: U9.9@3165.1,4890.16 3229,4890.16 3229.16,4890 C38.2@3294.45,4890 3294.45,4925 3310.45,4941 3527,4941 3716,5130 3716,5850 ; U5.4@3593,6010 3362.5,6010 3349,5996.5 3349,5760 3350,5759 3480,5759 3496,5775 3496,5820.5 3512.5,5837 3703,5837 3716,5850 ; SWD.1@3995,6585 3929.3,6519.3 C29.2@3929.3,6143.55 ; R35.1@4371.96,5545 4371.96,5508.51 4364.45,5501 C50.2@4364.45,5465 4364.45,5429.69 4362.76,5428 S1.5@4362.76,5394.53 4338,5394.53 4337,5393.53 4337,5261 4338,5260 R34.2@4371.96,5260 4371.96,5225 4384.96,5212 4781.37,5212 4794.37,5225 C4.2@4794.37,5265 4799.88,5270.51 U1.144@4989.81,5270.51 ; BOOT0.3@4552.95,3486.42 4604,3537.46 4604,3945.37 BOOT1.3@4547.95,4001.42 4595,4048.46 4595,4948 ; CARD.4@4689.52,6150.27 4689.52,6006.52 4686,6003 4686,5930 4683,5927 4641,5927 4640,5926 R7.2@4640,5891.96 ; C6.2@4794.37,5525 C6.2@4795.79,5526.42 ; U1.143@4989.81,5290.2 U1.144@4989.81,5270.51 ; v1(5087,6295) 5053,6295 5045,6287 C7.2@5045,6260.63 5070.51,6252.14 U1.108@5070.51,6040.2 5070.51,5990 5097.51,5963 5299.42,5963 5326.42,5993.58 ; R26.1@5155,4046.96 5155,4069.5 5255,4070 5285,4100 5285,4412 5117,4580 5117,4661 ; U1.6@5168.94,5189.8 5168.94,5001.45 5060,4892.51 C75.2@5060,4704.37 5100.13,4704.37 5117,4687.5 5117,4661 ; R11.2@5215,6333.04 R10.2@5295,6333.04 5295,6377 ; v1(5295,6442) 5295,6377 ; U1.95@5326.42,6040.2 5326.42,5993.58 ; v1(5492,5793) 5492,5694.89 5524,5662.89 ; C15.2@5495,4694.37 5458.03,4694.37 5453.03,4699.37 C14.2@5350,4699.37 C14.2@5339,4699.37 ; U1.84@5542.96,6040.2 5542.96,5990 ; C16.2@5640,6259.45 5592.18,6259.45 5591,6260.63 C9.2@5545,6260.63 5508.87,6260.63 5494.5,6275 5430.37,6275 5411,6255.63 C8.2@5385,6255.63 5385,6282 5403,6300 5422.5,6300 5435,6312.5 5435,6416 5335,6417 5295,6377 ; U1.30@5641.38,5189.8 5641.38,5287.5 5524,5404.88 5524,5662.89 ; R1.1@5765,4616.96 5765,4375 5841,4299 v1(5841,3551) ; U11.26@5916.56,2710.47 5916.56,2714.97 5989.59,2788 6027,2788 6054.29,2815.29 X3.4@6054.29,2886.96 6055,2886.96 6125.2,2957.16 C57.2@6127.84,2957.16 6127.84,3600.16 ; C10.2@6000.63,6040 5920.12,5959.49 U1.72@5840.2,5959.49 5840.69,5959 5864.69,5983 6038,5983 6041,5980 6041,5900 6061,5880 6088.06,5880 6089.06,5879 6089.06,5835 6075.56,5821.5 6043.5,5821.5 5984.64,5762.64 v1(5898,5762.64) U1.62@5840.2,5762.64 6003.27,5762.64 C11.2@6005.63,5765 ; C13.2@6005.63,5310 U1.39@5840.2,5309.88 6006,5309.88 6107,5208.88 6107,4838.5 6127.84,4817.66 v1(6127.84,3623.84) 6127.84,3612 6127.84,3600.16 ; C13.2@6005.63,5310 6005.63,5338 6045,5338 6046,5339 6046,5420.5 6005.63,5460.87 C12.2@6005.63,5565 ; v1(6116,3612) 6127.84,3600.16 ; U6.8@6310,4898.98 U6.7@6360,4898.98 6360,4812.5 6373.13,4799.37 6508,4799.37 ; v1(6410,4463) U6.3@6410,4621.02 6410,4701.37 6508,4799.37 ; v1(6789.5,6000.53) 6771.96,6018.07 R6.2@6771.96,6090 6742.21,6090 6733.21,6081 6699.37,6081 C33.1@6699.37,6090 6675.75,6066.38 6675.75,5872.66 6675.75,5665.5 6644.25,5634 U8.33@6644.25,5427.34 6644.25,5238.62 C34.2@6615.63,5210 6615.63,4865 C32.2@6550,4799.37 6508,4799.37 ; HEADER_7878.1@7295,4150 7616.63,4471.63 D2.1@7730,4471.63 ; v1(7332,3699) 7500,3699 7520.55,3678.45 C78.2@7520.55,3640 7520.55,3598.51 7518.04,3596 R74.2@7518.04,3555 ; v1(8672,6190) U2.2@8720,6190 ; U2.2@8720,6168 U2.2@8720,6190 ; R3.2@9290,6324.37 C20.2@9055,6324.37 9010.02,6324.37 8988,6346.39 C19.1@8945,6346.39 8945,6392 8925,6412 U2.4@8720,6412 U2.2@8720,6190 ; 3716,5850 3716,6138.5 3737.5,6160 U5.16@3827,6160 3869,6160 3885.45,6143.55 C29.2@3929.3,6143.55 ; C29.2@3929.3,6143.55 4034.41,6143.55 4286,5891.96 R9.2@4475,5891.96 R8.2@4555,5891.96 R7.2@4640,5891.96 ; 4595,4948 4595,4999 4866.51,5270.51 U1.144@4989.81,5270.51 ; 4595,4948 4331,5212 4331,5550 4574,5793 4774.37,5793 ; R7.2@4640,5891.96 R12.2@4725,5891.96 4725,5842.37 4774.37,5793 ; 4774.37,5793 4838,5793 4907.73,5723.27 ; 4774.37,5793 4794.37,5773 C5.2@4794.37,5725 4796.1,5723.27 U1.121@4989.81,5723.27 4907.73,5723.27 ; C6.2@4795.79,5526.42 U1.131@4989.81,5526.42 ; C6.2@4795.79,5526.42 4790.42,5526.42 4747,5483 4685,5483 4684,5602.73 4804.54,5723.27 4907.73,5723.27 ; C6.2@4795.79,5526.42 U1.131@4989.81,5526.42 ; U1.131@4989.81,5526.42 5040,5526.42 5428.58,5915 5467,5915 ; 5117,4661 5300.63,4661 C14.2@5339,4699.37 ; 5326.42,5993.58 5361,5959 5511.96,5959 5542.96,5990 ; C14.2@5339,4699.37 5298.13,4699.37 5285.12,4712.38 5285.12,4950.12 5385.47,5050.47 U1.17@5385.47,5189.8 5385.47,5301 5467,5382.53 5467,5915 ; 5467,5915 5509,5915 5524,5900 5524,5662.89 ; 5524,5662.89 5542.96,5643.93 ; 5542.96,5643.93 5542.96,5990 ; 5542.96,5643.93 5621.1,5565.79 U1.52@5840.2,5565.79 ; U1.52@5840.2,5565.79 C12.2@6005.63,5565 U1.52@5840.2,5565.79
  Bottom Layer w10: BOOT0.3@4552.95,3486.42 4594.54,3528 5818,3528 ; v1(5087,6295) 5148,6295 v1(5295,6442) ; v1(5492,5793) 5636,5793 5666.36,5762.64 v1(5898,5762.64) ; v1(5841,3551) 5818,3528 ; v1(6410,4463) 7013,4463 7268,4208 7268,4150 HEADER_7878.1@7295,4150 7339.47,4105.53 7339.47,3822.47 7318,3801 ; v1(6789.5,6000.53) 6800.03,5990 7925,5990 7945,6010 7945,6090 H1_PWR.1@7900,6135 8037,6135 8077,6095 8577,6095 v1(8672,6190) ; v1(7332,3699) 7339.47,3706.47 7339.47,3793.53 7332,3801 7318,3801 ; 5818,3528 6032,3528 v1(6116,3612) v1(6127.84,3623.84) 6305,3801 7318,3801
VCP: C60.2 L3.1 R53.2 U11.19 | length 6245.4
  Top Layer w10: U11.19@5972.24,2585.2 5982.44,2575 6066,2575 6078.5,2587.5 v1(6078.5,2717.5) ; v1(10482,2960) 10524,3002 10524,3798 10550,3824 10550,4155 C60.2@10550.55,4155 10550.55,4201 10548.04,4203.51 R53.2@10548.04,4250 10548.04,4293.54 L3.1@10641.7,4387.2
  Bottom Layer w10: v1(6078.5,2717.5) 6321,2960 v1(10482,2960)
VCP_IN: CN1.3 R56.1 R57.1 | length 1339.5
  Top Layer w10: R56.1@10465,4858.04 R57.1@10550,4858.04 10550,5323 10480,5393 10480,5991.58 CN1.3@10545,6056.58
VDDA: C1.2 C2.2 R1.2 R2.1 U1.33 | length 817
  Top Layer w10: R2.1@5680,4616.96 5684,4616.96 5760.08,4693.04 R1.2@5765,4693.04 ; U1.33@5700.44,5189.8 5700.44,5155.12 5699.28,5069.94 5765,5004.22 R1.2@5765,4693.04 ; C2.2@5940,4694.37 5895.18,4694.37 5894,4695.55 C1.2@5850,4695.55 5808.51,4695.55 5806,4693.04 R1.2@5765,4693.04
VREF: C3.2 R2.2 U1.32 | length 589.9
  Top Layer w10: C3.2@5590,4694.37 5634,4694.37 5635.33,4693.04 R2.2@5680,4693.04 5680,4826.68 5683.51,4830.2 5683.51,4952.06 5680.75,4954.82 U1.32@5680.75,5189.8
pads on no net: 3V3_AUX_LED.2 3V3_MAIN_LED.2 5V_LED.2 +1V. +1V.6 BOOT0.2 BOOT0.4 BOOT1.2 BOOT1.4 C1.1 C2.1 C3.1 C4.1 C5.1 C6.1 C7.1 C8.1 C9.1 C10.1 C11.1 C12.1 C13.1 C14.1 C15.1 C16.1 C17.2 C18.1 C19.2 C20.1 C21.2 C22.2 C23.1 C24.1 C25.1 C26.1 C27.2 C28.2 C29.1 C30.1 C31.1 C32.1 C33.2 C34.1 C35.1 C36.1 C37.2 C38.1 C39.1 C40.1 C41.1 C42.1 C43.1 C44.1 C45.1 C46.1 C47.2 C48.2 C49.2 C50.1 C51.1 C52.1 C53.1 C54.1 C55.1 C56.1 C57.1 C58.1 C59.1 C60.1 C61.1 C62.2 C63.2 C64.1 C65.2 C66.1 C67.2 C68.1 C69.2 C70.2 C71.1 C72.1 C73.2 C74.1 C75.1 C76.2 C77.1 CARD. CARD.6 CARD.10 CARD.11 CARD.12 CARD.13 D4.2 H1_PWR.2 H1_PWR.4 H1_PWR.6 H2_PWR.2 H2_PWR.4 H2_PWR.6 H3_PWR.2 H3_PWR.4 H3_PWR.6 H4_PWR.2 H4_PWR.4 H4_PWR.6 HEADER_7878.7 KEY_BACK.1 KEY_BACK.2 KEY_BACK.4 KEY_DOWN.1 KEY_DOWN.2 KEY_DOWN.4 KEY_IN.1 KEY_IN.2 KEY_IN.4 KEY_LEFT.1 KEY_LEFT.2 KEY_LEFT.4 KEY_RIGHT.1 KEY_RIGHT.2 KEY_RIGHT.4 KEY_UP.1 KEY_UP.2 KEY_UP.4 L1.2 L2.2 L3.2 Q1.2 R13.1 R14.1 R16.2 R21.1 R22.2 R23.2 R24.1 R25.1 R31.2 R36.1 R37.1 R38.1 R39.1 R41.1 R47.1 R48.1 R53.1 RESET.1 RESET.3 RESET.4 RJ1. RJ1.7 RJ1.13 RJ1.14 S1.2 S1.3 S1.6 S1.7 S1.8 S1.9 SWD.4 U1.16 U1.18 U1.19 U1.21 U1.22 U1.31 U1.38 U1.51 U1.61 U1.83 U1.92 U1.94 U1.107 U1.110 U1.117 U1.120 U1.122 U1.123 U1.124 U1.127 U1.130 U1.132 U1.133 U1.134 U1.139 U1.140 U2.1 U3.1 U4.1 U5.1 U5.9 U5.10 U5.11 U5.12 U5.13 U5.14 U5.15 U6.4 U7.3 U8.12 U8.34 U9.10 U9.25 U10.1 U10.2 U10.3 U10.7 U10.8 U10.9 U10.10 U10.11 U10.15 U10.16 U10.17 U10.19 U10.20 U10.21 U11.1 U11.2 U11.3 U11.6 U11.10 U11.11 U11.18 U11.20 U11.21 U11.28 U11.30 U11.31 U11.40 U11.41 U12.1 U13.2 U14.2 U15.1 U16.2 U17.1 U18.2 U19.1 UART_JUMPER_4G.5 UART_JUMPER_4G.6 UART_JUMPER_DW.5 UART_JUMPER_DW.6 ULTRASONIC_IN.3 USB_4G. USB_4G.4 USB_4G.5 USB_4G.6 USB_4G.7 USB_4G.8 USB_4G.9 USB_SERIAL. USB_SERIAL.4 USB_SERIAL.5 USB_SERIAL.6 USB_SERIAL.7 USB_SERIAL.8 USB_SERIAL.9 VCC_LED.2 X1.2 X1.4 X2.2 X2.4 X3.1 X3.2 X4.2 X4.4

## Text inside footprints (layer, text, board x,y; h text height)
+1V: Bottom Overlay "+5V" at 7153.47,5243 h59.05 r180; Bottom Overlay "RX4" at 7153.47,5341.42 h59.05 r180; Bottom Overlay "RX2" at 7153.47,5445.75 h59.05 r180; Bottom Overlay "TX2" at 7153.47,5548.11 h59.05 r180; Bottom Overlay "TX4" at 7151.5,5644.57 h59.05 r180; Bottom Overlay "GND" at 7151.51,5741.03 h59.05 r180
BUZZER: Bottom Overlay "+" at 4972.32,3533.18 h50 r225
L1: Bottom Overlay "*" at 9597.9,4893.11 h80 r31; Bottom Overlay "*" at 9594.1,4415.81 h80 r31
L2: Bottom Overlay "*" at 10142.9,4888.11 h80 r31; Bottom Overlay "*" at 10139.1,4410.81 h80 r31
L3: Bottom Overlay "*" at 10667.9,4893.11 h80 r31; Bottom Overlay "*" at 10664.1,4415.81 h80 r31